# Altium PCB Breakout_10pin.PcbDoc
Units mm, origin at the board's own origin, x right, y up, seen from the top; angles counter-clockwise.
Board outline 55 x 25 mm, 2 copper layers (Top Layer, Bottom Layer), stack 1.571 mm thick; 7 components, 10 nets, 38 pads, 0 vias.
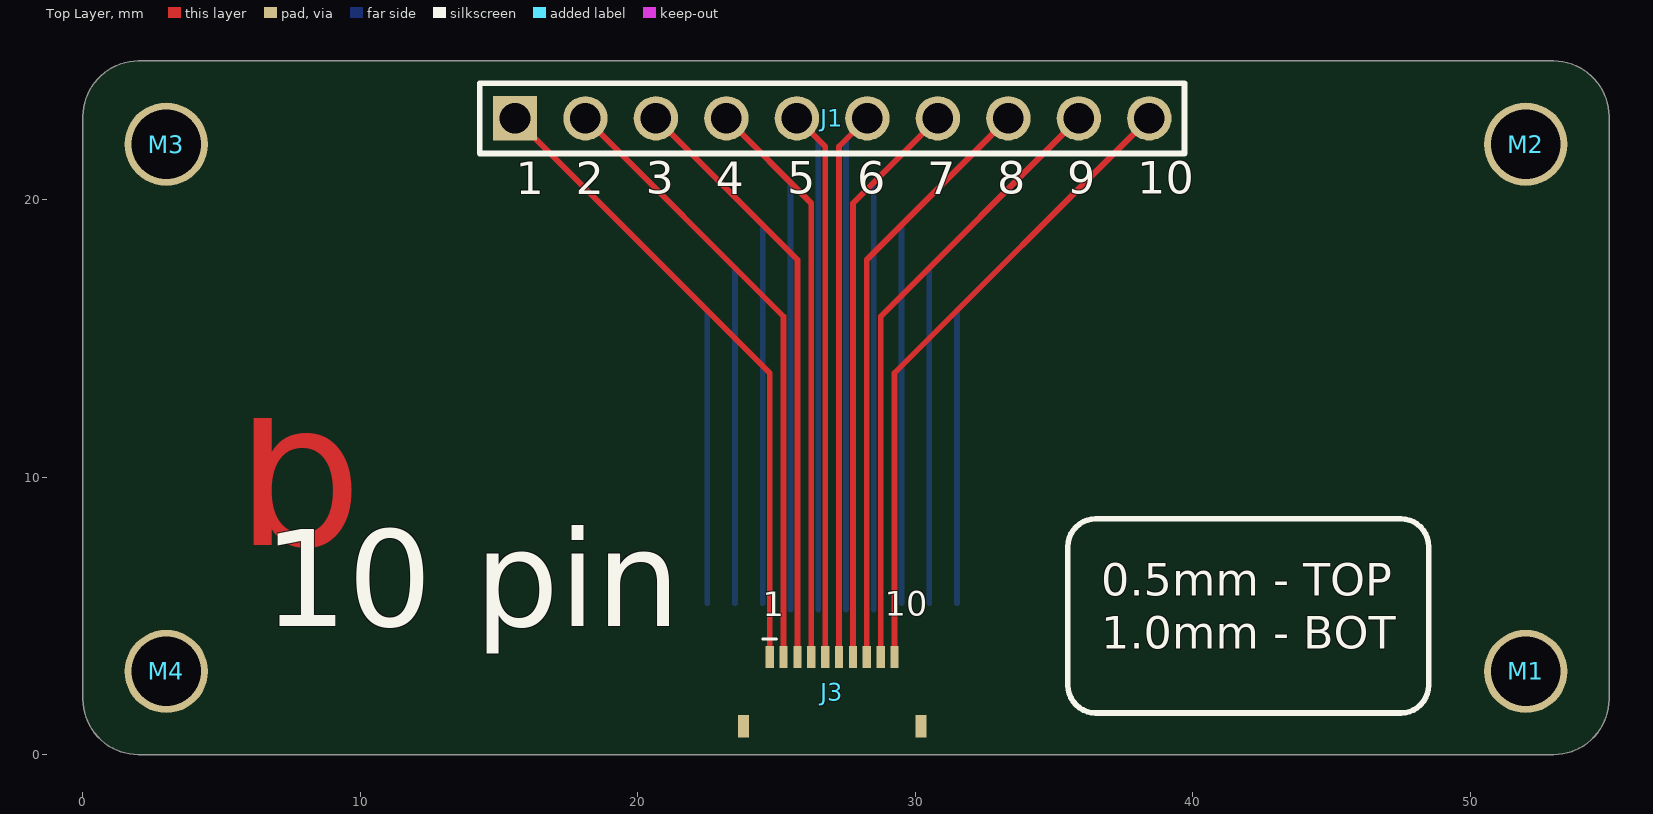
[diagram p0: Top Layer view]
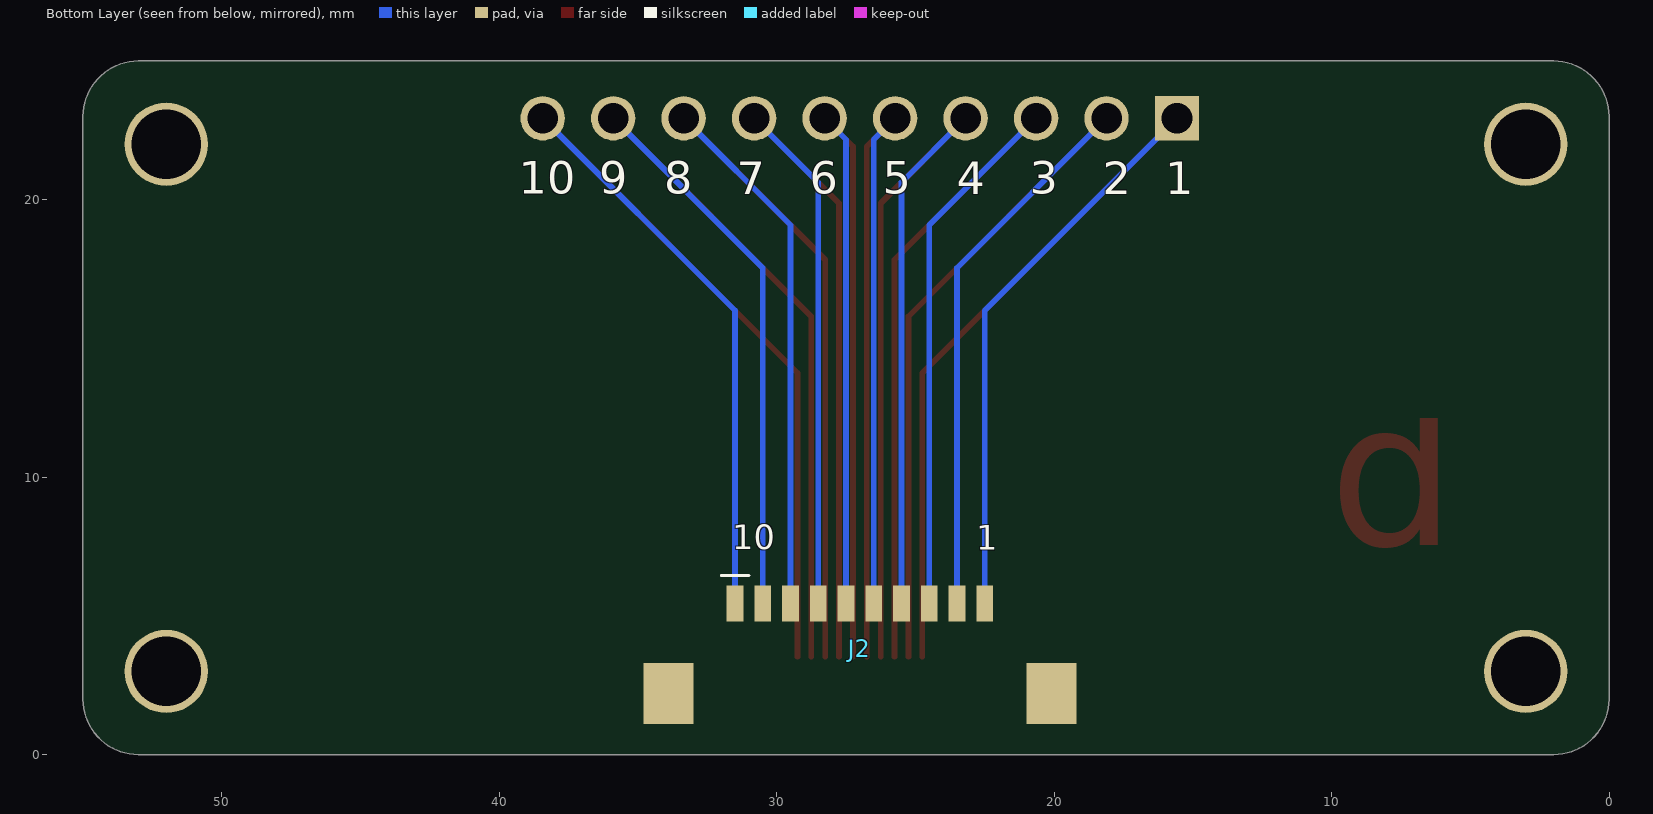
[diagram p1: Bottom Layer view, seen from below]

## Layer stack, top to bottom
Top Solder: solder mask 0.0102, Solder Resist, Dk 3.5
Top Layer: signal copper 0.0356
Dielectric 1: dielectric 1.5, FR-4, Dk 4.8
Bottom Layer: signal copper 0.0356
Bottom Solder: solder mask 0.0102, Solder Resist, Dk 3.5

## Board outline
2,0 cw(c2,2) 0,2 0,23 cw(c2,23) 2,25 53,25 cw(c53,23) 55,23 55,2 cw(c53,2) 53,0

## Design rules (kind name [scope] priority, off if disabled: settings)
Clearance [All] p1: gap=0.204 ignorepadtopadclearanceinfootprint=TRUE
DiffPairsRouting [All] p1: maxlimit=0.254 minlimit=0.064 mostfreqgap=0.127 toplayer_minwidth=0.178 toplayer_maxwidth=0.457 toplayer_prefwidth=0.457 bottomlayer_minwidth=0.178 bottomlayer_maxwidth=0.457 bottomlayer_prefwidth=0.457 impedanceprofiledriven=TRUE maxuncoupledlength=12.7
HoleSize [All] p1: absolutevalues=TRUE maxlimit=5 minlimit=0.153 maxpercent=80.000 minpercent=20.000
MinimumSolderMaskSliver [All] p1: minsoldermaskwidth=0.178
PolygonConnect [All] p1: connectstyle=Relief reliefconductorwidth=0.254 reliefentries=4 polygonreliefangle="90 Angle" airgapwidth=0.254
RoutingVias [All] p1: holewidth=0.305 width=0.61 viastyle="Through Hole" minholewidth=0.254 minwidth=0.508 maxholewidth=0.5 maxwidth=1.27
SolderMaskExpansion [All] p1: expansion=0.102 istentingtop=FALSE
Width [All] p1: maxlimit=25.4 minlimit=0.204 preferedwidth=0.254 minimp=50.000000 maximp=50.000000 favimp=50.000000
27 further rules are at their usual default settings.

## Components (designator, comment, footprint, x,y, rotation, side; value= is the part's Value field where it differs from the comment)
J1 "61301011121" HDR-V-10P-2.54MM 27,22.935 r0 top
J2 "XF3M(1)-1015-1B" CONN-FFC-H-10P-1MM 27,3.829 r180 bottom
J3 "FFC2B28-10-G" CONN-FFC-H-10P-0.5MM 27,2.272 r0 top
M1 "MTG_HOLE" MH_P_2.5MM 52,3 r90 top
M2 "MTG_HOLE" MH_P_2.5MM 52,22 r90 top
M3 "MTG_HOLE" MH_P_2.5MM 3,22 r90 top
M4 "MTG_HOLE" MH_P_2.5MM 3,3 r90 top

## Footprints (in the part's own frame and the unit in brackets; to place one, negate y for a bottom-side part, rotate by r counter-clockwise, add the part's x,y. Pads: shape width x height; smd on the part's side, far side on the other; paste and mask are expansions set on the pad)
CONN-FFC-H-10P-0.5MM [mm]
  rect 0.3x0.8 smd: 1(-2.25,1.25) 2(-1.75,1.25) 3(-1.25,1.25) 4(-0.75,1.25) 5(-0.25,1.25) 6(0.25,1.25) 7(0.75,1.25) 8(1.25,1.25) 9(1.75,1.25) 10(2.25,1.25)
  rect 0.4x0.8 smd: ME1(-3.2,-1.25) ME2(3.2,-1.25)
  silkscreen extent -2.5,1.9 -2,1.9, body extent -3.5,-1.8 3.5,1.45, height 1.72
CONN-FFC-H-10P-1MM [mm]
  rect 0.6x1.3 smd: 1(-4.5,1.625) 2(-3.5,1.625) 3(-2.5,1.625) 4(-1.5,1.625) 5(-0.5,1.625) 6(0.5,1.625) 7(1.5,1.625) 8(2.5,1.625) 9(3.5,1.625) 10(4.5,1.625)
  rect 1.8x2.2 smd: ME1(-6.9,-1.625) ME2(6.9,-1.625)
  silkscreen extent -5,2.63 -4,2.63, body extent -7.3,-3.67 7.3,2.73, height 2
HDR-V-10P-2.54MM [mm]
  rect 1.6x1.6 hole 1.1: 1(-11.43,0)
  round 1.6 hole 1.1: 2(-8.89,0) 3(-6.35,0) 4(-3.81,0) 5(-1.27,0) 6(1.27,0) 7(3.81,0) 8(6.35,0) 9(8.89,0) 10(11.43,0)
  silkscreen extent -12.7,-1.27 12.7,1.27, body extent -12.7,-1.27 12.7,1.27, height 8.55
MH_P_2.5MM [mm]
  round 3 hole 2.5: 1(0,0)

## Part data
J1: library part HDR-V-1X10-M-2.54MM, "THT Vertical Pin Header WR-PHD, Pitch 2.54 mm, Single Row, 10 pins", Color=Black, Current Rating=3A, Flammability Rating="UL94 V-0", Insulation Resistance=1GR, Manufacturer 1="Wurth Electronics", Max Operating Temperature=105°C, Min Operating Temperature=-40°C, Supplier Part Number=16T0627, Voltage Rating=250V, Category="Headers and Wire Housings", ComponentLink1Description=https://datasheet.ciiva.com/738/6130xx11121-738550.pdf?src-supplier=Digi-Key, ComponentLink1URL=https://datasheet.ciiva.com/738/6130xx11121-738550.pdf?src-supplier=Digi-Key, ComponentLink2Description=https://datasheet.ciiva.com/7631/1442175-7631321.pdf?src-supplier=Element14, ComponentLink2URL=https://datasheet.ciiva.com/7631/1442175-7631321.pdf?src-supplier=Element14, ComponentLink3Description=https://datasheet.ciiva.com/48700/001088187-da-01-en-wr-phd-tht-stiftleiste-61301011121-48700876.pdf?src-supplier=Conrad, ComponentLink3URL=https://datasheet.ciiva.com/48700/001088187-da-01-en-wr-phd-tht-stiftleiste-61301011121-48700876.pdf?src-supplier=Conrad, Connector Type=Header, Contact Finish - Mating=GOLD, Contact Gender=Male, Contact Material="Copper Alloy,Copper", Contact Plating=Gold, Contact Shape=Square, Contact Type="Male Pin", Fastening Type=Pull, Gender=Male, Height=11.54mm, Housing Material=PBT, Insulation Color=Black, Insulation Material=Nylon, Length=2.54mm, Manufacturer Part Number 1=61301011121, Mounting Technology="Through Hole", Number of Contacts=10, Number of Positions=10, Number of Rows=1, Orientation=Straight, Packaging=Bulk, Pitch=2.54mm, Pricing="1=0.65, 10=0.65, 25=0.65, 50=0.65, 100=0.6 (USD)", Reach SVHC Compliant=Unknown, RoHS=Yes, RoHS Compliant=Yes, Series=WR-PHD, Stock=997, Supplier=Newark, Termination=Solder, Width=25.4mm
J2: library part CONN-FFC-H-10P-1MM, "1.0-mm Pitch, Dual Contact ; For FPC/FFC, 10 Contacts, RoHS", Actuator Color=Black, Current Rating=500mA, Flammability Rating="UL94 V-0", Housing Color=Natural, Manufacturer 1=Omron, Max Operating Temperature=85°C, Min Operating Temperature=-30°C, Package Quantity=1500, Voltage Rating=50V, Actuator Material="Polymer,Liquid Crystal Polymer", Category="FFC / FPC", ComponentLink1Description=https://datasheet.ciiva.com/48563/en-xf3m-48563769.pdf?src-supplier=Avnet, ComponentLink1URL=https://datasheet.ciiva.com/48563/en-xf3m-48563769.pdf?src-supplier=Avnet, Contact Material="Copper Alloy", Contact Plating=Gold, Housing Material=Polymer, Manufacturer Part Number 1=XF3M(1)-1015-1B, Mating Cycles=20, Mounting Technology="Surface Mount", Number of Contacts=10, Number of Positions=10, Number of Rows=1, Orientation="Right Angle", Packaging="Tape and Reel", Pitch=0.039inch, Pricing="1=0.915, 10=0.8221, 25=0.8139, 50=0.8057, 100=0.7768, 250=0.7566, 500=0.719, 1000=0.5891 (USD)", Radiation Hardening=No, RoHS=Yes, RoHS Compliant=Yes, Series=XF3M, Stock=1, Supplier="Arrow Electronics", Supplier Part Number=XF3M(1)-1015-1B, Termination=Solder
J3: library part CONN-FFC-H-10P-0.5MM, "CONN, FPC, 10POS, 1ROW, 0.5MM, R/A SMT; Pitch Spacing: 0.5mm; No. of Contacts: 10Contacts; Gender: Receptacle;...", Manufacturer 1="Global Connector Technology", Supplier Part Number=90AJ6008, Category=Connectors, Manufacturer Part Number 1=FFC2B28-10-G, Pricing="1=0.515, 250=0.397, 500=0.357, 1000=0.325, 4000=0.325, 5000=0.298 (USD)", RoHS=No, Stock=3980, Supplier=Newark
M1 M2 M3 M4: "MTG HOLE PLATED VARIOUS SIZES"

## Nets (pads, with @x,y where several pads share a name; then routed paths per layer and width w, separated by ;. In a path a pad name is that pad's centre, name@x,y a point inside that pad or via, vN(x,y) a via of type N, cw(c..) or ccw(c..) an arc to the next point about the centre after c; other vN are vias at no path point)
NetJ1_1: J1.1 J2.10 J3.1 | length 43.6
  Top Layer w0.204: J1.1 24.75,13.755 J3.1
  Bottom Layer w0.204: J1.1 22.5,16.005 J2.10
NetJ1_2: J1.2 J2.9 J3.2 | length 42.1
  Top Layer w0.204: J1.2 25.25,15.795 J3.2
  Bottom Layer w0.204: J1.2 23.5,17.545 J2.9
NetJ1_3: J1.3 J2.8 J3.3 | length 40.6
  Top Layer w0.204: J1.3 25.75,17.835 J3.3
  Bottom Layer w0.204: J1.3 24.5,19.085 J2.8
NetJ1_4: J1.4 J2.7 J3.4 | length 39.3
  Top Layer w0.204: J1.4 26.25,19.875 J3.4
  Bottom Layer w0.204: J1.4 25.5,20.625 J2.7@25.5,5.229
NetJ1_5: J1.5 J2.6 J3.5 | length 37.9
  Top Layer w0.204: J1.5 26.75,21.915 J3.5
  Bottom Layer w0.204: J1.5 26.5,22.165 J2.6@26.5,5.229
NetJ1_6: J1.6 J2.5 J3.6 | length 37.9
  Top Layer w0.204: J3.6 27.25,21.915 J1.6
  Bottom Layer w0.204: J2.5@27.5,5.229 27.5,22.165 J1.6
NetJ1_7: J1.7 J2.4 J3.7 | length 39.3
  Top Layer w0.204: J3.7 27.75,19.875 J1.7
  Bottom Layer w0.204: J2.4@28.5,5.229 28.5,20.625 J1.7
NetJ1_8: J1.8 J2.3 J3.8 | length 40.6
  Top Layer w0.204: J3.8 28.25,17.835 J1.8
  Bottom Layer w0.204: J2.3 29.5,19.085 J1.8
NetJ1_9: J1.9 J2.2 J3.9 | length 42.1
  Top Layer w0.204: J3.9 28.75,15.795 J1.9
  Bottom Layer w0.204: J2.2 30.5,17.545 J1.9
NetJ1_10: J1.10 J2.1 J3.10 | length 43.6
  Top Layer w0.204: J3.10 29.25,13.755 J1.10
  Bottom Layer w0.204: J2.1 31.5,16.005 J1.10
pads on no net: J2.ME1 J2.ME2 J3.ME1 J3.ME2 M1.1 M2.1 M3.1 M4.1

## Other copper
Top Layer:
  text "b" at 5.5,4.9 h13.97

## Silkscreen, mask and mechanical layers (free items; w line width, h text height)
Top Overlay:
  lines w0.2: 35.5,2.5 ccw(c36.5,2.5) 36.5,1.5 47.5,1.5 ccw(c47.5,2.5) 48.5,2.5 48.5,7.5 ccw(c47.5,7.5) 47.5,8.5 36.5,8.5 ccw(c36.5,7.5) 35.5,7.5 35.5,2.5 ; 35.5,2.5 35.5,2.5
  text "1" at 15.6,19.8 h2
  text "2" at 17.754,19.8 h2
  text "3" at 20.283,19.821 h2
  text "4" at 22.805,19.8 h2
  text "5" at 25.374,19.821 h2
  text "6" at 27.907,19.821 h2
  text "7" at 30.436,19.8 h2
  text "8" at 32.948,19.821 h2
  text "9" at 35.475,19.821 h2
  text "10" at 38,19.821 h2
  text "0.5mm - TOP" at 36.7,5.338 h2
  text "10" at 28.9,4.716 h1.5
  text "1" at 24.5,4.7 h1.5
  text "10 pin" at 6.5,3.468 h6
  text "1.0mm - BOT" at 36.7,3.421 h2
  text "c" at 3.169,-11.643 h50
Bottom Overlay:
  text "1" at 16,19.8 h2
  text "2" at 18.254,19.8 h2
  text "3" at 20.883,19.821 h2
  text "4" at 23.505,19.8 h2
  text "5" at 26.174,19.821 h2
  text "6" at 28.807,19.821 h2
  text "7" at 31.436,19.8 h2
  text "8" at 34.048,19.821 h2
  text "9" at 36.4,19.821 h2
  text "10" at 39.3,19.821 h2
  text "1" at 22.8,7.1 h1.5
  text "10" at 31.6,7.116 h1.5
Board Outline:
  lines w0.1: 27,25 27.5,25 ; 0,2 ccw(c2,2) 2,0 53,0 ccw(c53,2) 55,2 55,23 ccw(c53,23) 53,25 2,25 ccw(c2,23) 0,23 0,2